# Altium PCB m6_base_v2.PcbDoc
Units mm, origin at the board's own origin, x right, y up, seen from the top; angles counter-clockwise.
Board outline 85 x 85 mm, 2 copper layers (Top Layer, Bottom Layer); 62 components, 65 nets, 251 pads, 206 vias.
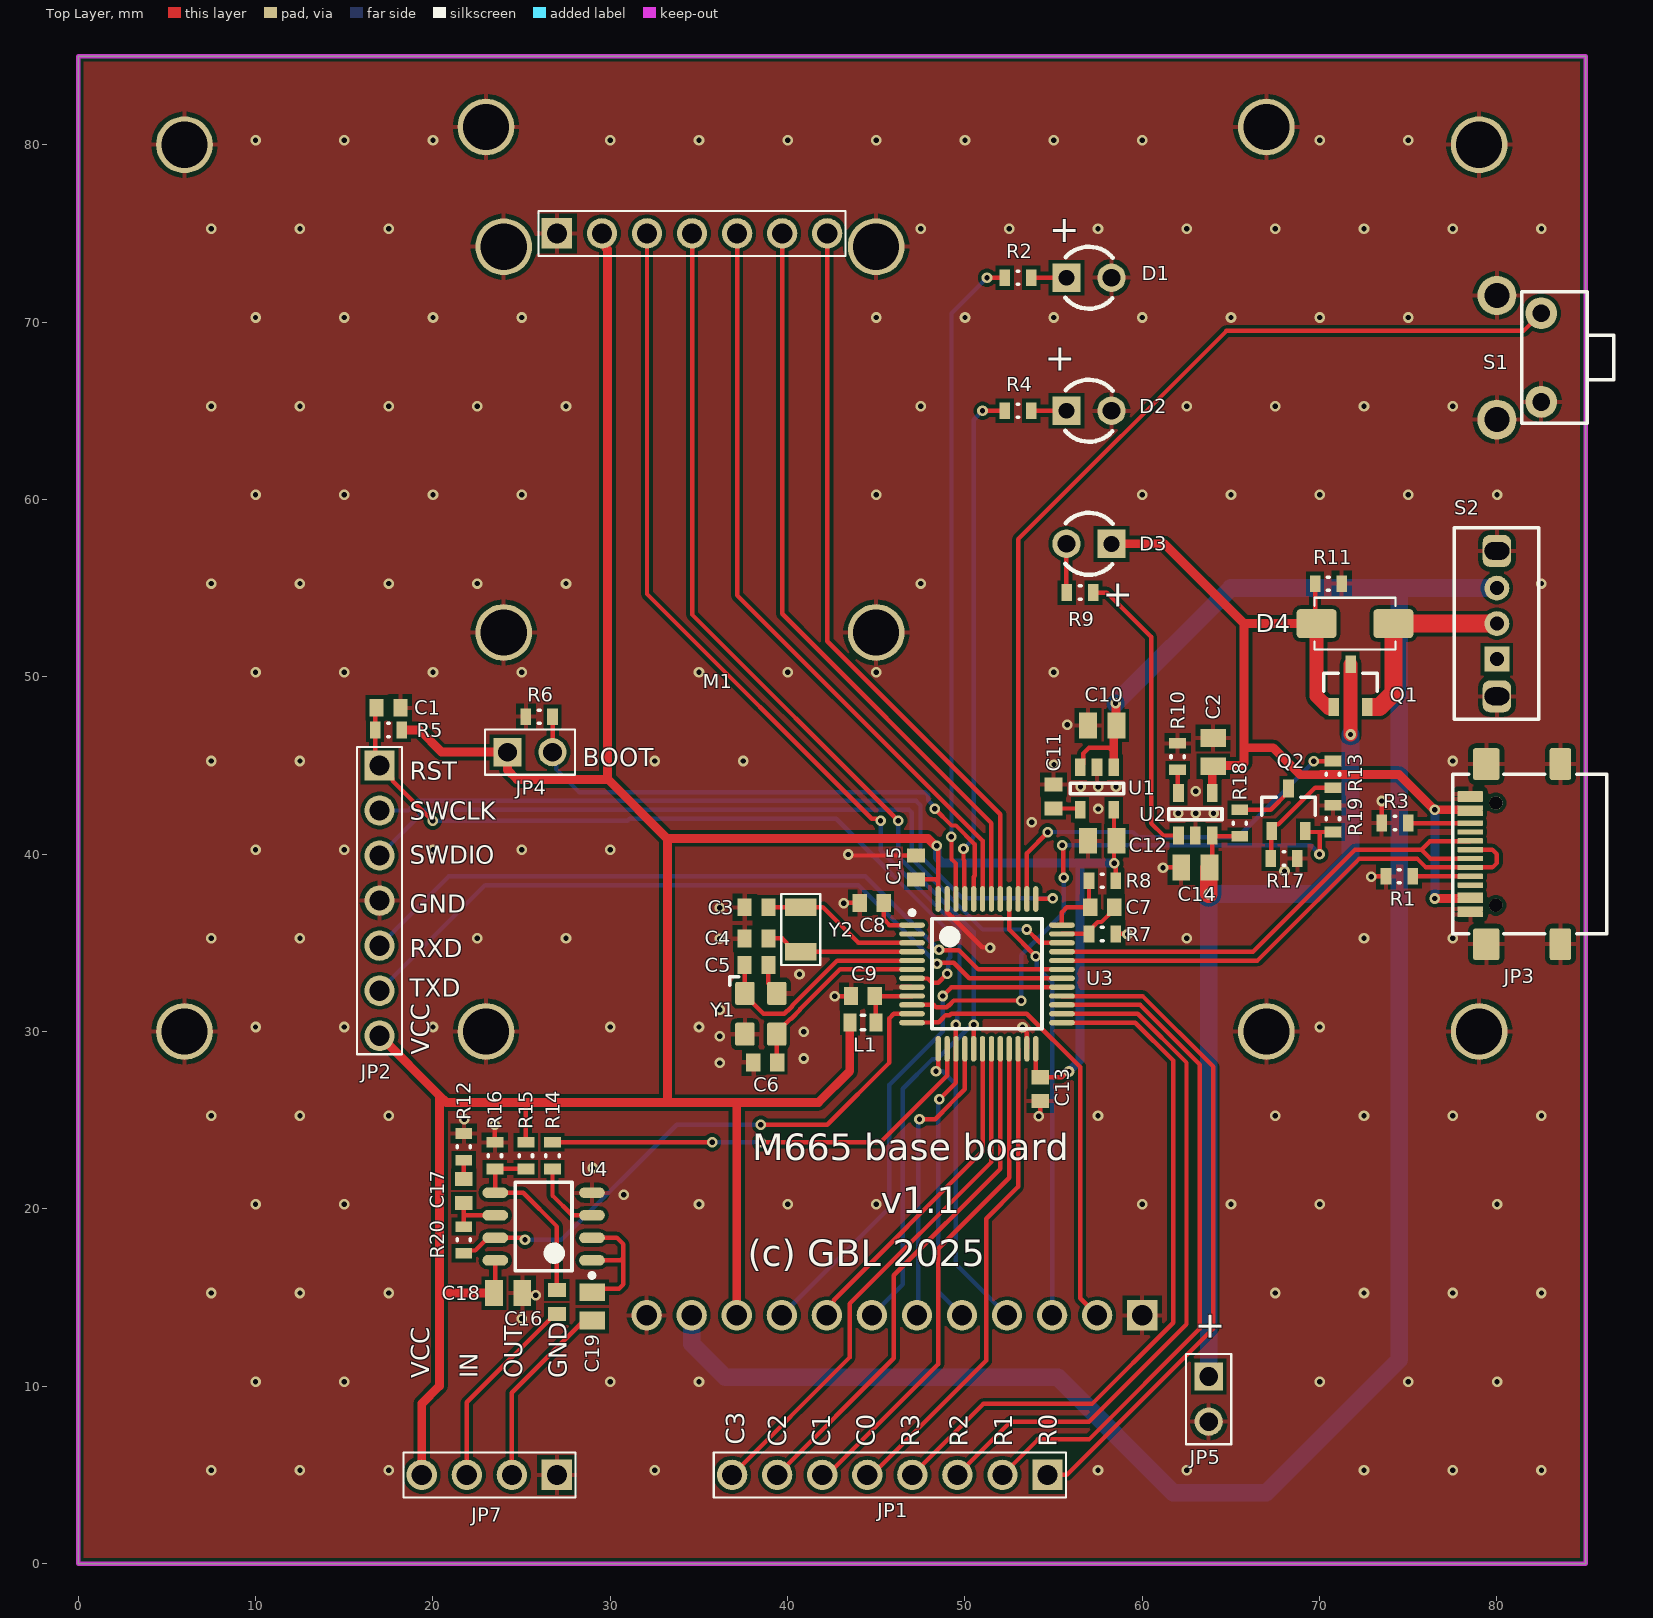
[diagram p0: Top Layer view]
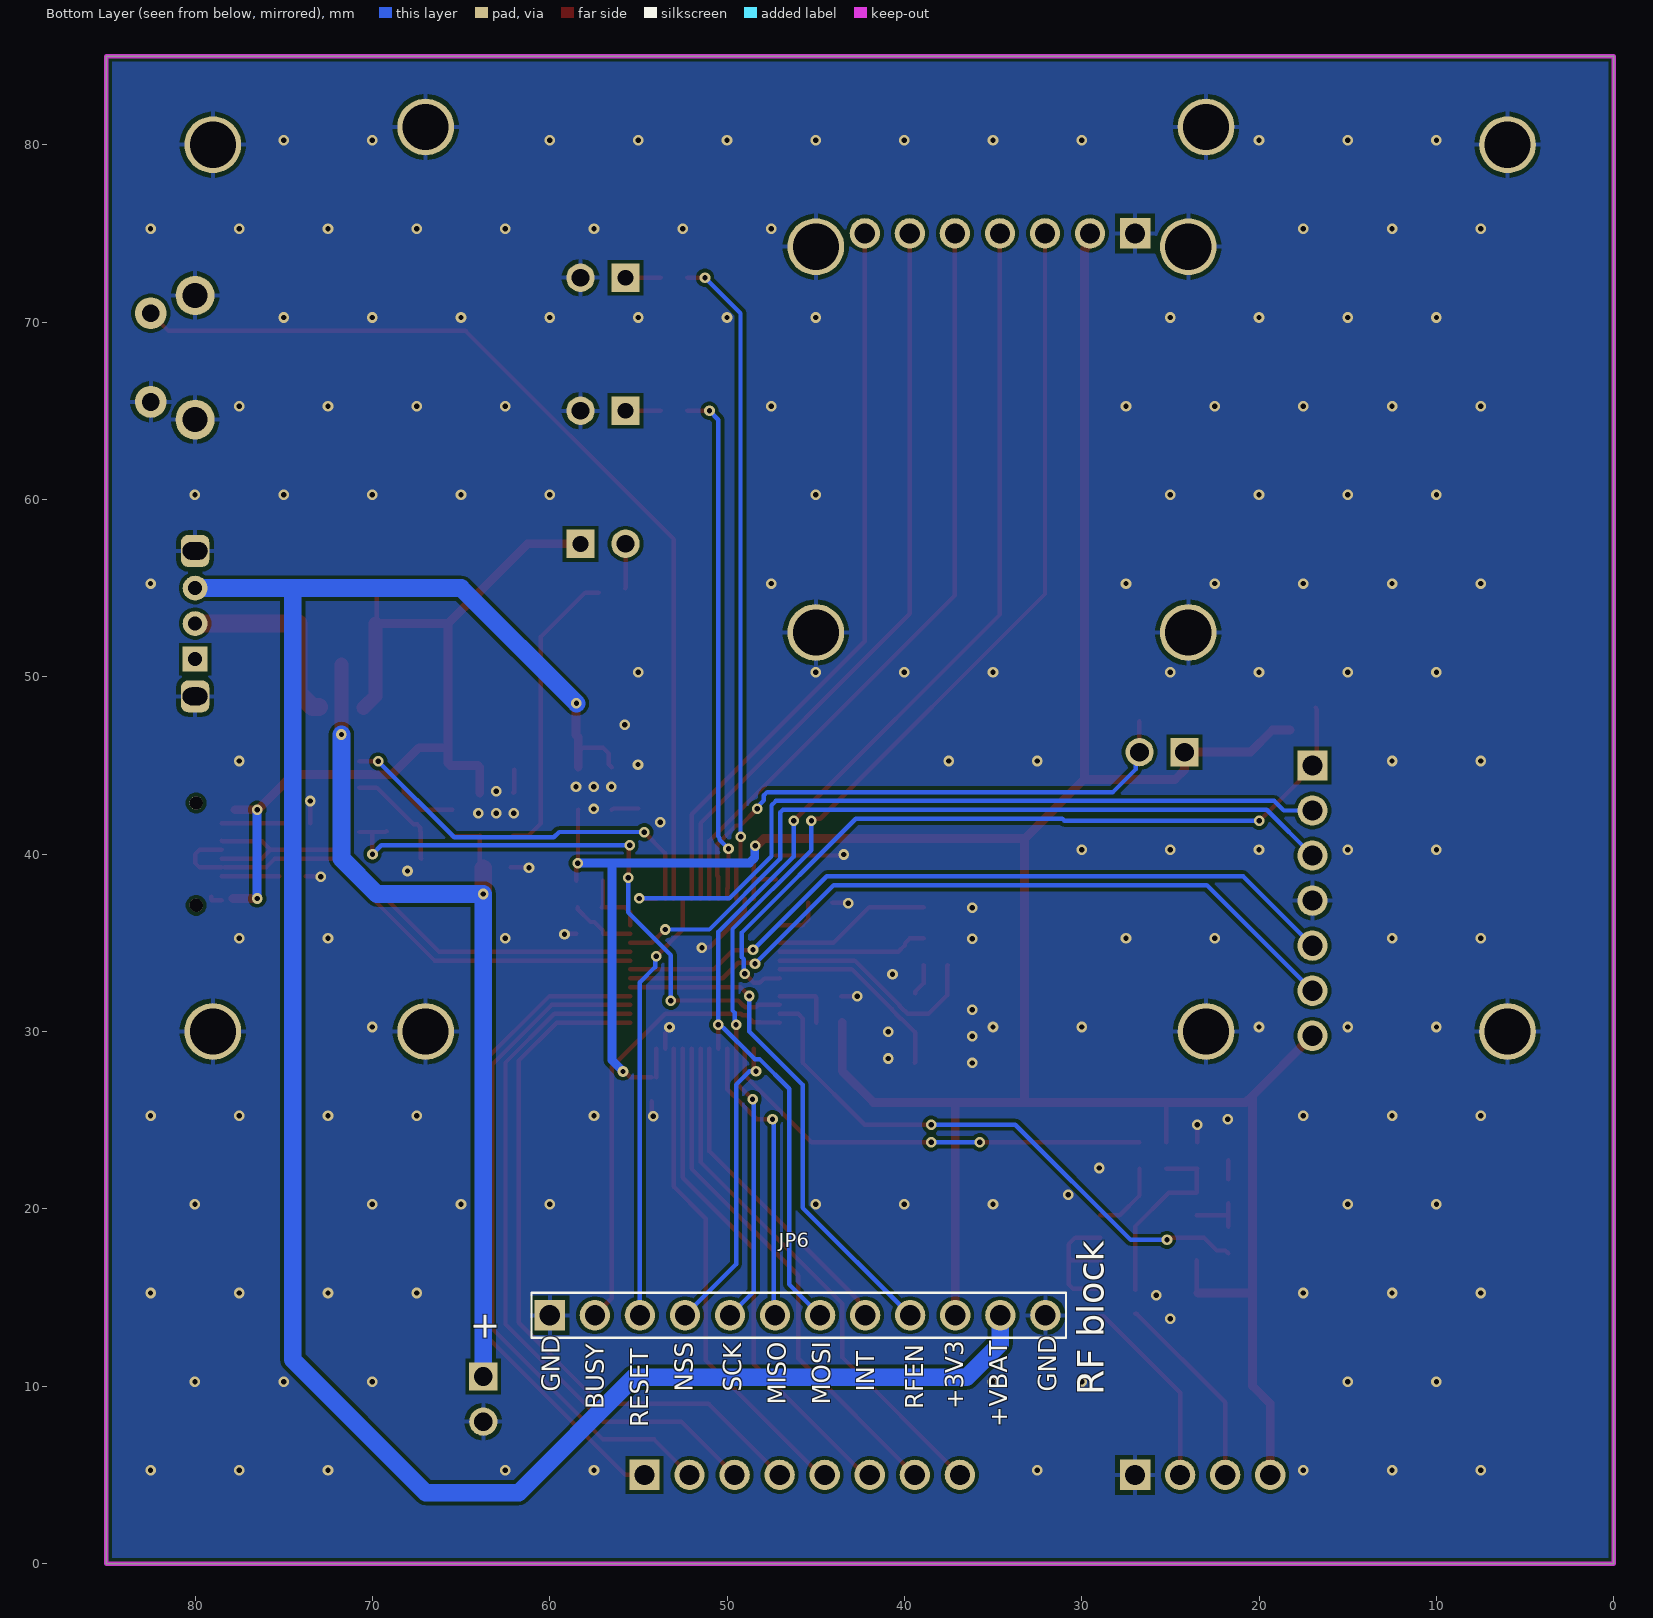
[diagram p1: Bottom Layer view, seen from below]
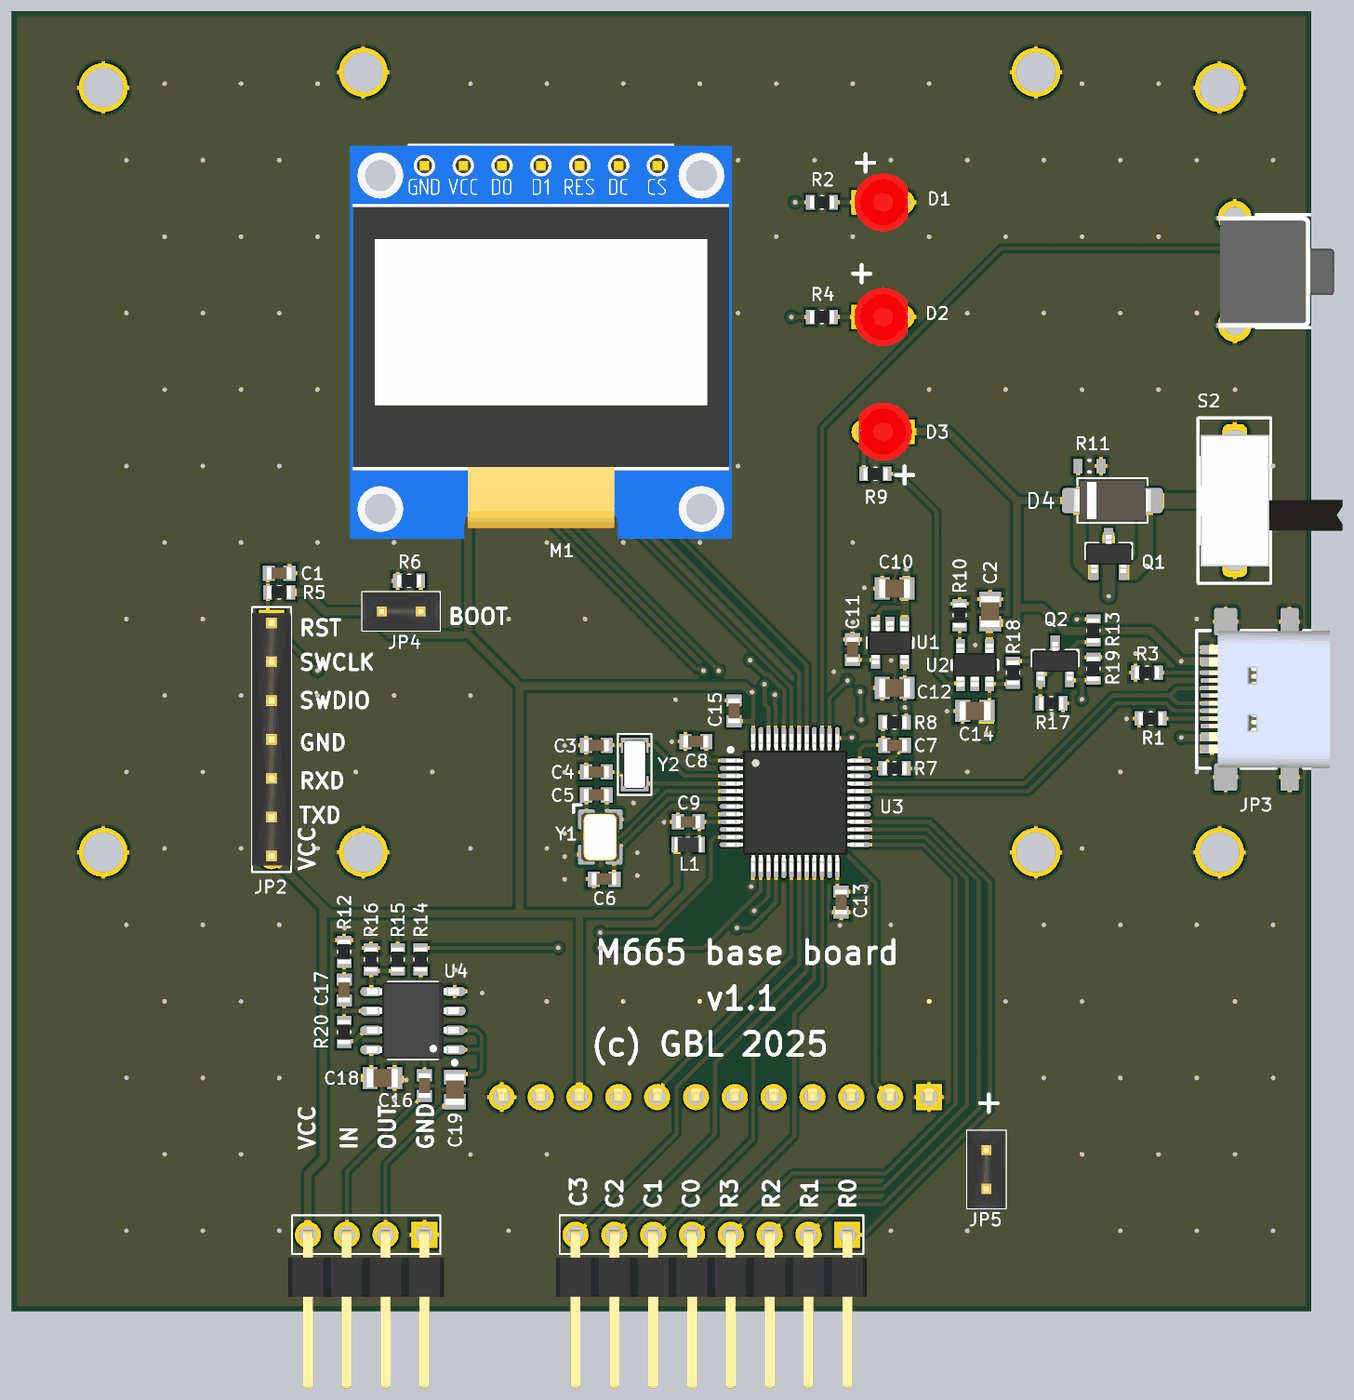
[diagram p2: 3D render of the assembled board from above, using the file's embedded part models]

## Layer stack, top to bottom
Top Solder: solder mask 0.0102, Solder Resist, Dk 3.5
Top Layer: signal copper 0.0356
Dielectric 1: dielectric 0.32, FR-4, Dk 4.8
Bottom Layer: signal copper 0.0356
Bottom Solder: solder mask 0.0102, Solder Resist, Dk 3.5

## Board outline
0,0 0,85 85,85 85,0

## Design rules (kind name [scope] priority, off if disabled: settings)
Clearance [All] p1: gap=0.2 ignorepadtopadclearanceinfootprint=FALSE
ComponentClearance [All] p1: gap=0.2 collisioncheckmode=3 verticalgap=0.2 showdistances=FALSE
HoleSize [All] p1: absolutevalues=TRUE maxlimit=5 minlimit=0.025 maxpercent=80.000 minpercent=20.000
MinimumSolderMaskSliver [All] p1: minsoldermaskwidth=0.05
PolygonConnect PolygonConnect_2 [All vs IsNamedPolygon('GND_L01_P001') Or IsNamedPolygon('GND_L01_P002') Or IsNamedPolygon('GND_L02_P000')] p1: thpad.connectstyle=Relief thpad.reliefconductorwidth=0.254 thpad.reliefentries=4 thpad.polygonreliefangle="90 Angle" thpad.airgapwidth=0.254 smdpad.connectstyle=Relief smdpad.reliefconductorwidth=0.254 smdpad.reliefentries=4 smdpad.polygonreliefangle="90 Angle" smdpad.airgapwidth=0.254 via.connectstyle=Direct via.reliefconductorwidth=0.254 via.reliefentries=4 via.polygonreliefangle="90 Angle" via.airgapwidth=0.254
PolygonConnect PolygonConnect_1 [All vs IsNamedPolygon('GND_L01_P001') Or IsNamedPolygon('GND_L02_P000')] p2: thpad.connectstyle=Relief thpad.reliefconductorwidth=0.254 thpad.reliefentries=4 thpad.polygonreliefangle="90 Angle" thpad.airgapwidth=0.25 smdpad.connectstyle=Relief smdpad.reliefconductorwidth=0.254 smdpad.reliefentries=4 smdpad.polygonreliefangle="90 Angle" smdpad.airgapwidth=0.25 via.connectstyle=Direct via.reliefconductorwidth=0.254 via.reliefentries=4 via.polygonreliefangle="90 Angle" via.airgapwidth=0.254
PolygonConnect [All] p3: connectstyle=Relief reliefconductorwidth=0.254 reliefentries=4 polygonreliefangle="90 Angle" airgapwidth=0.254
RoutingVias [All] p1: holewidth=0.711 width=1.27 viastyle="Through Hole" minholewidth=0.711 minwidth=1.27 maxholewidth=0.711 maxwidth=1.27
SilkToSilkClearance [All] p1: silktosilkclearance=0.1
SilkToSolderMaskClearance [IsPad] p1: minsilkscreentomaskgap=0.05 clearancetoexposedcopper=TRUE
SolderMaskExpansion [All] p1: expansion=0.102 istentingtop=FALSE
SupplyNets "Schematic Supply Nets_4" [InNet('V_BATT')] p1: voltage=0.000
SupplyNets "Schematic Supply Nets_3" [InNet('V_IN')] p2: voltage=0.000
SupplyNets "Schematic Supply Nets_2" [InNet('GND')] p3: voltage=0.000
SupplyNets "Schematic Supply Nets_1" [InNet('V_BUS')] p4: voltage=0.000
SupplyNets "Schematic Supply Nets" [InNet('VCC')] p5: voltage=0.000
Width [All] p1: maxlimit=2 minlimit=0.2 preferedwidth=0.25
25 further rules are at their usual default settings.

## Components (designator, comment, footprint, x,y, rotation, side; value= is the part's Value field where it differs from the comment)
C1 "100nF" C-0603 17.5,48.25 r180 top
C2 "10uF" C-0805 64,45.75 r270 top
C3 "22pF" C-0603 38.25,37 r0 top
C4 "22pF" C-0603 38.25,35.25 r0 top
C5 "22pF" C-0603 38.25,33.75 r180 top
C6 "22pF" C-0603 38.75,28.25 r180 top
C7 "nc" C-0603 57.75,37 r180 top
C8 "100nF" C-0603 44.75,37.25 r180 top
C9 "1uF" C-0603 44.25,32 r0 top
C10 "10uF" C-0805 57.75,47.25 r180 top
C11 "nc" C-0603 55,43.25 r90 top
C12 "10uF" C-0805 57.75,40.75 r180 top
C13 "100nF" C-0603 54.25,26.75 r90 top
C14 "10uF" C-0805 63,39.25 r0 top
C15 "100nF" C-0603 47.25,39.25 r270 top
C16 "1uF" C-0603 27,14.75 r90 top
C17 "1uF" C-0603 21.75,21 r270 top
C18 "10uF" C-0805 24.25,15.25 r180 top
C19 "CAPN" C-0805 29,14.5 r270 top
D1 "DLED" LED_3mm_RED 57,72.5 r0 top
D2 "DLED" LED_3mm_RED 57,65 r0 top
D3 "DLED" LED_3mm_RED 57,57.5 r180 top
D4 "DIODSH" D-SMA 72,53 r0 top
JP1 "HEADER8" PLS1-8R_1 54.66,5 r180 top
JP2 "HEADER 7" PLS1-7 17,45 r270 top
JP3 "L-KLS1-5473" L-KLS1-5473 78.5,40 r90 top
JP4 "JMP 2" PLS1-2 24.21,45.75 r0 top
JP5 "HEADER 2" PLS1-2 63.75,10.54 r270 top
JP6 "HEADER 12" PLS1-12R_1 60,14 r180 bottom locked
JP7 "HEADER4" PLS1-4R 27,5 r180 top
L1 "BEAD" L-0603 44.25,30.5 r180 top
M1 "OLED0_96" OLED096 27,75 r0 top locked
Q1 "IRLML6401" SOT-23 71.75,49.5 r90 top
Q2 "2N7002" SOT-23 68.25,42.5 r90 top
R1 "5k1" R-0603 74.5,38.75 r0 top
R2 "470" R-0603 53,72.5 r180 top
R3 "5k1" R-0603 74.25,41.75 r0 top
R4 "470" R-0603 53,65 r180 top
R5 "22k" R-0603 17.5,47 r180 top
R6 "22k" R-0603 26,47.75 r0 top
R7 "nc" R-0603 57.75,35.5 r180 top
R8 "nc" R-0603 57.75,38.5 r180 top
R9 "1k" R-0603 56.5,54.75 r180 top
R10 "4k7" R-0603 62,45.5 r270 top
R11 "10k" R-0603 70.5,55.25 r180 top
R12 "10k" R-0603 21.75,23.5 r270 top
R13 "1k" R-0603 70.75,44.5 r90 top
R14 "10k" R-0603 26.75,23 r270 top
R15 "100k" R-0603 25.25,23 r90 top
R16 "100k" R-0603 23.5,23 r90 top
R17 "1M" R-0603 68,39.75 r180 top
R18 "100k" R-0603 65.5,41.75 r270 top
R19 "10k" R-0603 70.75,42 r270 top
R20 "100k" R-0603 21.75,18.25 r90 top
S1 "KLS7-TS3602 -3 15-180" KLS7-TS3602 82.5,68 r90 top
S2 "SW SPDT" SK-12D07VG5 80,53 r90 top
U1 "LP5907MFX-3.0" SOT-23-5 57.45,43.7 r270 top
U2 "MCP73831-2ATI/OT" SOT-23-5 63,42.25 r90 top value={Value}
U3 "AT32F413CBU7" LQFP-48 51.25,33.25 r0 top
U4 "LM2904DR" SO-8 26.25,19 r180 top
Y1 "8.0M" ZQ_SJK-7U 38.5,31 r270 top
Y2 "32.768k" KX-327 40.75,35.75 r90 top

## Footprints (in the part's own frame and the unit in brackets; to place one, negate y for a bottom-side part, rotate by r counter-clockwise, add the part's x,y. Pads: shape width x height; smd on the part's side, far side on the other; paste and mask are expansions set on the pad)
C-0603 [mm] "Chip Capacitor, 2-Leads, Body 1,60x0,80mm, IPC Medium Density"
  rect 0.8x1 smd: 1(-0.675,0) 2(0.675,0)
  body extent -0.8,-0.4 0.8,0.4, height 0.8
C-0805 [mm] "Chip Capacitor, 2-Leads, Body 2,00x1,25mm, IPC Medium Density"
  rect 1x1.45 smd: 1(-0.8,0) 2(0.8,0)
  body extent -1,-0.62 1,0.63, height 1.25
D-SMA [mm] "Diode, Molded Body; 4.315 mm L X 2.605 mm W X 2.41 mm H body"
  rrect30% 2.27x1.65 smd: 1(-2.165,0) 2(2.165,0)
  silkscreen extent -2.29,-1.46 2.29,1.46, body extent -2.61,-1.3 2.61,1.3, height 2.41
KLS7-TS3602 [mm] "miniature switch"
  round 1.8 hole 1: 1(-2.5,0) 2(2.5,0)
  oval 2.25x2.2 hole 1.4: 3(-3.5,2.5)
  round 2.2 hole 1.4: 3(3.5,2.5)
  silkscreen extent -3.7,-4.1 3.7,1.1, body extent -3.7,-3.97 3.6,3.75, height 4.4
KX-327 [mm]
  rect 1x1.8 smd: 1(-1.25,0) 2(1.25,0)
  silkscreen extent -2,-1.1 2,1.1, body extent -1.6,-0.75 1.6,0.75, height 0.71
L-0603 [mm] "Chip Inductor, 2-Leads, Body 1,60x0,80mm, IPC Medium Density"
  rect 0.74x1.02 smd: 1(-0.735,0) 2(0.735,0)
  silkscreen extent -0.1,-0.41 0.1,0.41, body extent -0.9,-0.5 0.9,0.5, height 1
L-KLS1-5473 [mm] "USB 3.1 Type C"
  rrect20% 1.8x1.2 smd mask+0.07: 1(-5.08,-5.08) 1(5.08,-5.08)
  rrect20% 1.8x1.5 smd mask+0.07: 1(-5.08,-0.9) 1(5.08,-0.9)
  rrect30% 0.3x1.45 smd paste-2 mask+0.07: A1(-3.1,0) A4(-2.6,0) A9(2.6,0) A12(3.4,0) B1(3.1,0) B4(2.3,0) B9(-2.3,0) B12(-3.4,0)
  rrect30% 0.3x1.45 smd mask+0.07: A5(-1.25,0) A6(-0.25,0) A7(0.25,0) A8(1.25,0) B5(1.75,0) B6(0.75,0) B7(-0.75,0) B8(-1.75,0)
  round 0.75 hole 0.75 unplated paste-2539.97 mask+0.07: MH(-2.885,-1.44) MH(2.885,-1.44)
  silkscreen extent -4.5,-7.69 4.5,1, body extent -4.47,-7.7 4.47,0.2, height 3.2
LED_3mm_RED [mm]
  rect 1.6x1.6 hole 0.9: 1(-1.27,0)
  round 1.6 hole 1: 2(1.27,0)
  silkscreen extent -1.34,-1.75 1.34,1.75, body extent -1.9,-1.9 1.6,1.9, height 5.75
LQFP-48 [mm] "TSQFP, 48-Leads, Body 7,00x7,00mm, Pitch 0,50mm, IPC Medium Density"
  oval 1.45x0.3 smd: 1(-4.225,2.75) 2(-4.225,2.25) 3(-4.225,1.75) 4(-4.225,1.25) 5(-4.225,0.75) 6(-4.225,0.25) 7(-4.225,-0.25) 8(-4.225,-0.75) 9(-4.225,-1.25) 10(-4.225,-1.75) 11(-4.225,-2.25) 12(-4.225,-2.75) 25(4.225,-2.75) 26(4.225,-2.25) 27(4.225,-1.75) 28(4.225,-1.25) 29(4.225,-0.75) 30(4.225,-0.25) 31(4.225,0.25) 32(4.225,0.75) 33(4.225,1.25) 34(4.225,1.75) 35(4.225,2.25) 36(4.225,2.75)
  oval 0.3x1.45 smd: 13(-2.75,-4.225) 14(-2.25,-4.225) 15(-1.75,-4.225) 16(-1.25,-4.225) 17(-0.75,-4.225) 18(-0.25,-4.225) 19(0.25,-4.225) 20(0.75,-4.225) 21(1.25,-4.225) 22(1.75,-4.225) 23(2.25,-4.225) 24(2.75,-4.225) 37(2.75,4.225) 38(2.25,4.225) 39(1.75,4.225) 40(1.25,4.225) 41(0.75,4.225) 42(0.25,4.225) 43(-0.25,4.225) 44(-0.75,4.225) 45(-1.25,4.225) 46(-1.75,4.225) 47(-2.25,4.225) 48(-2.75,4.225)
  silkscreen extent -4.35,-3.1 3.1,3.57, body extent -4.5,-4.5 4.5,4.5, height 1.5
OLED096 [mm] "Header, Vertical, 2.54 mm pitch; 0.70 mm lead width, 7 pins, 1 row, 7 pins per row, 16.51 mm L X 2.54 mm W X 7.54 mm H body"
  rect 1.71x1.71 hole 1.14 paste-2539.97: 1(0,0)
  round 1.71 hole 1.14 paste-2539.97: 2(2.54,0) 3(5.08,0) 4(7.62,0) 5(10.16,0) 6(12.7,0) 7(15.24,0)
  silkscreen extent -1.04,-1.27 16.28,1.27, body extent -4.88,-24.5 20.12,1.2, height 9.08
PLS1-2 [mm] "Header, Vertical, 2.54 mm pitch; 0.64 mm lead width, 2 pins, 1 row, 2 pins per row, 5.08 mm L X 2.54 mm W X 8.54 mm H body"
  rect 1.59x1.59 hole 1.06 paste-2539.97: 1(0,0)
  round 1.59 hole 1.06 paste-2539.97: 2(2.54,0)
  silkscreen extent -1.27,-1.27 3.81,1.27, body extent -1.27,-1.27 3.81,1.27, height 8.54
PLS1-4R [mm] "Header, Vertical, 2.54 mm pitch; 0.70 mm lead width, 4 pins, 1 row, 4 pins per row, 8.89 mm L X 2.54 mm W X 7.54 mm H body"
  rect 1.71x1.71 hole 1.14 paste-2539.97: 1(0,0)
  round 1.71 hole 1.14 paste-2539.97: 2(2.54,0) 3(5.08,0) 4(7.62,0)
  silkscreen extent -1.04,-1.27 8.66,1.27, body extent -1.27,-0.32 8.89,10.04, height 2.54
PLS1-7 [mm] "Header, Vertical, 2.54 mm pitch; 0.70 mm lead width, 7 pins, 1 row, 7 pins per row, 16.51 mm L X 2.54 mm W X 7.54 mm H body"
  rect 1.71x1.71 hole 1.14 paste-2539.97: 1(0,0)
  round 1.71 hole 1.14 paste-2539.97: 2(2.54,0) 3(5.08,0) 4(7.62,0) 5(10.16,0) 6(12.7,0) 7(15.24,0)
  silkscreen extent -1.04,-1.27 16.28,1.27, body extent -0.64,-1.27 15.88,1.27, height 7.54
PLS1-8R_1 [mm] "Header, Vertical, 2.54 mm pitch; 0.70 mm lead width, 8 pins, 1 row, 8 pins per row, 19.05 mm L X 2.54 mm W X 7.54 mm H body"
  rect 1.71x1.71 hole 1.14 paste-2539.97: 1(0,0)
  round 1.71 hole 1.14 paste-2539.97: 2(2.54,0) 3(5.08,0) 4(7.62,0) 5(10.16,0) 6(12.7,0) 7(15.24,0) 8(17.78,0)
  silkscreen extent -1.04,-1.27 18.82,1.27, body extent -1.27,-0.32 19.05,10.04, height 2.54
PLS1-12R_1 [mm] "Header, Vertical, 2.54 mm pitch; 0.70 mm lead width, 10 pins, 1 row, 10 pins per row, 24.13 mm L X 2.54 mm W X 7.54 mm H body"
  rect 1.71x1.71 hole 1.14 paste-2539.97: 1(0,0)
  round 1.71 hole 1.14 paste-2539.97: 2(2.54,0) 3(5.08,0) 4(7.62,0) 5(10.16,0) 6(12.7,0) 7(15.24,0) 8(17.78,0) 9(20.32,0) 10(22.86,0) 11(25.4,0) 12(27.94,0)
  silkscreen extent -1.04,-1.27 29.1,1.27, body extent -1.27,-0.32 29.21,10.04, height 5.04
R-0603 [mm] "Chip Resistor, 2-Leads, Body 1,60x0,82mm, IPC Medium Density"
  rect 0.6x0.95 smd: 1(-0.75,0) 2(0.75,0)
  silkscreen extent -0.05,-0.38 0.05,0.38, body extent -0.8,-0.4 0.8,0.4, height 0.45
SK-12D07VG5 [mm]
  rect 1.4x1.4 hole 0.8: 1(-2,0)
  round 1.4 hole 0.8: 2(0,0) 3(2,0)
  rrect50% 1.8x1.6 hole 1 slot 1.4 at 90 deg: S1(-4.1,0) S1(4.1,0)
  silkscreen extent -5.4,-2.35 5.4,2.4, body extent -4.3,-7.05 4.3,2.3, height 4.75
SO-8 [mm] "SOIC, 8-Leads, Body 4,90x3,90mm, Pitch 1,27mm, IPC Medium Density"
  oval 1.45x0.6 smd: 1(-2.725,1.905) 2(-2.725,0.635) 3(-2.725,-0.635) 4(-2.725,-1.905) 5(2.725,-1.905) 6(2.725,-0.635) 7(2.725,0.635) 8(2.725,1.905)
  silkscreen extent -2.85,-2.5 1.6,2.88, body extent -3,-2.5 3,2.5, height 1.75
SOT-23 [mm]
  rect 1x0.6 smd: 1(-1.2,0.95) 2(-1.2,-0.95) 3(1.2,0)
  silkscreen extent -0.3,-1.5 0.7,1.5, body extent -1.25,-1.5 1.25,1.5, height 1.2
SOT-23-5 [mm] "SOT23, 5-Leads, Body 2,90x2,45mm, Pitch 0,95mm, IPC Medium Density"
  rect 1x0.6 smd: 1(-1.2,0.95) 2(-1.2,0) 3(-1.2,-0.95) 4(1.2,-0.95) 5(1.2,0.95)
  silkscreen extent -0.3,-1.5 0.3,1.5, body extent -1.4,-1.45 1.4,1.45, height 1.55
ZQ_SJK-7U [mm]
  rrect20% 1.3x1.1 smd mask+0.06: 1(-1.15,-0.9) 2(1.15,-0.9) 3(1.15,0.9) 4(-1.15,0.9)
  silkscreen extent -2.1,-1.75 -1.6,-1.25, body extent -1.6,-1.25 1.6,1.25, height 0.6

## Part data
C1 C2 C3 C4 C5 C6 C7 C8 C9 C10 C11 C12 C13 C14 C15 C16 C17 C18: library part CAPN, Voltage=50V, Вид=Конденсатор, Точність/група=NP0
C19: Voltage=50V, Вид=Конденсатор, Точність/група=NP0
Q1: library part MOSF-P, Вид=Транзистор
Q2: library part MOSF-N, Вид=Транзистор
R1 R2 R3 R4 R5 R6 R7 R8 R9 R10 R11 R12 R13 R14 R15 R16 R17 R18 R19 R20: library part RES, Вид=Резистор, Точність/група=5%
S1: library part SW-1, Вид=Кнопка
U1: library part LP5907, "250mA Low-Dropout Regulator", Вид=Мікросхема
U2: Man#Part Num#=TPS61023DRLT, Manufacturer="Texas Instruments", Package=SOT-563, Temperature Range="-40°C ~ 125°C (TJ)", Component Type=SMD, Footprint Part=IC-package.PcbLib, IC Type=PMIC, Library Part=IC`s.SchLib, Mounting  Method=SMD, Part Number=MCP73831-2ATI/OT, Part Type=IC, Suplier 1=https://www.digikey.com.au/en/products/detail/texas-instruments/TPS61023DRLT/11310622?s=N4IgTCBcDaICoAUDKA2AjABjAZgCICUAZOEAXQF8g, URL=https://www.ti.com/general/docs/suppproductinfo.tsp?distId=10&gotoUrl=https%3A%2F%2Fwww.ti.com%2Flit%2Fgpn%2Ftps61023
U4: library part LM2904, "Dual Operational Amplifiers, SOIC-8", Вид=Мікросхема
Y1: library part TSX-3225, "Crystal, 24 MHz, 9 pF, SMD", Вид=Трансформатор
Y2: library part Y, Вид=Кварц, Точність/група=20ppm
D1 D2 D3: Вид=Світлодіод
D4: Вид=Діод
JP1 JP2 JP4 JP5 JP6 JP7: Вид=Роз'єм
JP3: Mounting  Method=SMD
L1: Вид="Ferrite bead"
S2: Вид=Перемикач
U3: Вид=Мікросхема

## Free pads (board coordinates)
  round 3.2 hole 2.6: 1(6,30) 1(6,80) 1(23,30) 1(23,81) 1(24,52.5) 1(24,74.25) 1(45,52.5) 1(45,74.25) 1(67,30) 1(67,81) 1(79,30) 1(79,80)

## Via types
v1: diameter 0.6, hole 0.3, Top Layer to Bottom Layer, tented both sides, 206 vias

## Nets (pads, with @x,y where several pads share a name; then routed paths per layer and width w, separated by ;. In a path a pad name is that pad's centre, name@x,y a point inside that pad or via, vN(x,y) a via of type N, cw(c..) or ccw(c..) an arc to the next point about the centre after c; other vN are vias at no path point)
ADC_IN: R20.1 U3.11 U4.7 | length 32.4
  Top Layer w0.25: R20.1 21.903,17.653 22.403,17.653 23.115,18.365 24.993,18.365 25.108,18.25 v1(25.203,18.25) ; v1(38.5,24.75) 42.25,24.75 45.75,28.25 45.75,30.75 46,31 U3.11
  Bottom Layer w0.25: v1(25.203,18.25) 27.25,18.25 33.75,24.75 v1(38.5,24.75)
AUDIO_IN: C16.1 JP7.3 | length 11.2
  Top Layer w0.25: JP7.3 21.92,9.095 26.9,14.075 C16.1
AUDIO_OUT: C19.2 JP7.2 | length 11
  Top Layer w0.25: JP7.2 24.46,9.635 28.775,13.95 C19.2@29,13.95
BAT_LEVEL: Q2.2 R19.2 U3.10 | length 33.8
  Top Layer w0.25: U3.10 48.253,31.5 48.378,31.375 48.971,31.375 49.052,31.457 49.086,31.457 49.38,31.75 v1@53.25,31.75 ; v1(55.5,40.5) 55.539,40.461 55.539,38.711 v1(55.579,38.671) ; Q2.2 69.25,41.25 70,41.25 ; v1(70,40) 70,41.25 ; R19.2 70,41.25
  Bottom Layer w0.25: v1(53.174,31.729) 53.174,34.308 55.579,36.713 v1(55.579,38.671) ; v1(55.5,40.5) 69.5,40.5 v1(70,40)
BAT_MEAS: R13.2 U3.38 | length 22.3
  Top Layer w0.25: U3.38 53.5,40.055 v1(54.674,41.229) ; v1@69.5,45.25 R13.2
  Bottom Layer w0.25: v1@54.75,41.25 59.475,41.25 59.775,40.95 65.395,40.95 v1(69.674,45.229)
BOOT: JP4.2 R6.2 U3.44 | length 32
  Top Layer w0.25: R6.2@26.75,47.5 26.77,47.48 26.77,45.27 JP4.2@26.79,45.25 ; v1(48.308,42.558) 49.251,41.615 49.499,41.615 50.55,40.564 50.55,38.78 50.5,38.73 U3.44
  Bottom Layer w0.25: JP4.2 26.952,45.548 26.952,44.798 28.25,43.5 47.75,43.5 47.927,43.323 47.927,43.034 48.308,42.653 v1(48.308,42.558)
C0: JP1.5 U3.22 | length 27.7
  Top Layer w0.25: JP1.5 44.75,5 51.2,11.45 51.2,19.45 53,21.25 U3.22
C1: JP1.6 U3.21 | length 28.6
  Top Layer w0.25: JP1.6 42.25,5 48.5,11.25 48.5,17.75 52.5,21.75 U3.21
C2: JP1.7 U3.20 | length 29.2
  Top Layer w0.25: JP1.7 46,11.58 46,16.25 52,22.25 U3.20
C3: JP1.8 U3.19 | length 30.1
  Top Layer w0.25: JP1.8 43.5,11.62 43.5,14.644 51.5,22.644 U3.19
DAC_OUT: R14.1 U3.14 | length 25.3
  Top Layer w0.25: R14.1 v1(35.75,23.75) ; v1(38.5,23.75) 45.25,23.75 49,27.5 U3.14
  Bottom Layer w0.25: v1(35.75,23.75) v1(38.5,23.75)
DM: JP3.A7 JP3.B7 U3.32 | length 29.2
  Top Layer w0.25: U3.32 66.5,34 72.25,39.75 75.5,39.75 76,39.25 JP3.B7@78.354,39.25 ; JP3.B7 79.75,39.25 80,39.5 80,40 79.75,40.25 JP3.A7
DP: JP3.A6 JP3.B6 U3.33 | length 28.6
  Top Layer w0.25: U3.33 66.25,34.5 72,40.25 75.75,40.25 ; JP3.A6 76.25,39.75 75.75,40.25 ; JP3.B6 78.475,40.725 76.225,40.725 75.75,40.25
GND: C1.1 C2.1 C3.1 C4.1 C5.1 C6.2 C8.2 C9.1 C10.2 C11.2 C12.2 C13.1 C14.1 C15.1 C18.1 D1.2 D2.2 JP2.4 JP3.1 JP3.A1 JP3.A12 JP3.B1 JP3.B12 JP5.2 JP6.1 JP6.12 JP7.1 M1.1 pad.1 R1.1 R3.1 R6.1 R7.1 R10.1 R11.1 R12.1 R16.2 R17.1 R19.1 S1.1 S1.3 S2.S1 U1.2 U2.2 U3.8 U3.23 U3.47 U4.4 Y1.2 Y1.4 | length 18.1
  Top Layer w0.25: R16.2 v1(23.5,24.75) ; C5.1 38.925,32.725 39.4,32.25 Y1.4 ; v1@42.75,32 C9.1 ; v1@43.25,37.25 C8.2 ; v1@43.5,40 43.575,39.925 C15.1 ; U3.47 49.01,37.465 49.01,36.719 50.978,34.75 v1@51.5,34.75 ; v1(53.25,30.25) 53.25,30.155 53.49,29.915 53.49,29.035 U3.23 ; v1@54.25,25.25 C13.1 ; R7.1 v1@59.25,35.5 ; v1@61.25,39.25 C14.1 ; v1@73,38.75 R1.1 ; R3.1 v1(73.5,43)
  other v1: 7.51,5.256 12.51,5.256 17.51,5.256 32.51,5.256 57.51,5.256 62.51,5.256 72.51,5.256 77.51,5.256 82.51,5.256 10.01,10.256 15.01,10.256 30.01,10.256 35.01,10.256 70.01,10.256 75.01,10.256 80.01,10.256 25.026,13.8 25.804,15.123 7.51,15.256 12.51,15.256 17.51,15.256 67.51,15.256 72.51,15.256 77.51,15.256 82.51,15.256 10.01,20.256 15.01,20.256 35.01,20.256 40.01,20.256 45.01,20.256 60.01,20.256 65.01,20.256 70.01,20.256 80.01,20.256 30.776,20.8 29.026,22.3 21.776,25.05 54.174,25.229 7.51,25.256 12.51,25.256 17.51,25.256 57.51,25.256 67.51,25.256 72.51,25.256 77.51,25.256 82.51,25.256 36.174,28.229 40.924,28.479 36.174,29.729 40.924,29.979 10.01,30.256 15.01,30.256 20.01,30.256 30.01,30.256 35.01,30.256 70.01,30.256 36.174,31.229 42.674,31.979 40.674,33.229 51.424,34.729 36.174,35.229 7.51,35.256 12.51,35.256 22.51,35.256 27.51,35.256 62.51,35.256 72.51,35.256 77.51,35.256 59.174,35.479 36.174,36.979 43.174,37.229 72.924,38.729 68.026,39.05 61.174,39.229 43.424,39.979 10.01,40.256 15.01,40.256 20.01,40.256 25.01,40.256 30.01,40.256 53.776,41.8 62.026,42.3 63.026,42.3 64.026,42.3 57.526,42.55 63.026,43.55 56.526,43.8 57.526,43.8 58.526,43.8 55.026,45.05 7.51,45.256 12.51,45.256 32.51,45.256 37.51,45.256 77.51,45.256 55.776,47.3 10.01,50.256 15.01,50.256 20.01,50.256 25.01,50.256 35.01,50.256 40.01,50.256 45.01,50.256 55.01,50.256 7.51,55.256 12.51,55.256 17.51,55.256 22.51,55.256 27.51,55.256 47.51,55.256 82.51,55.256 10.01,60.256 15.01,60.256 20.01,60.256 25.01,60.256 45.01,60.256 60.01,60.256 65.01,60.256 70.01,60.256 75.01,60.256 80.01,60.256 7.51,65.256 12.51,65.256 17.51,65.256 22.51,65.256 27.51,65.256 47.51,65.256 62.51,65.256 67.51,65.256 72.51,65.256 77.51,65.256 10.01,70.256 15.01,70.256 20.01,70.256 25.01,70.256 45.01,70.256 50.01,70.256 55.01,70.256 60.01,70.256 65.01,70.256 70.01,70.256 75.01,70.256 7.51,75.256 12.51,75.256 17.51,75.256 47.51,75.256 52.51,75.256 57.51,75.256 62.51,75.256 67.51,75.256 72.51,75.256 77.51,75.256 82.51,75.256 10.01,80.256 15.01,80.256 20.01,80.256 30.01,80.256 35.01,80.256 40.01,80.256 45.01,80.256 50.01,80.256 55.01,80.256 60.01,80.256 70.01,80.256 75.01,80.256
GREEN: R2.2 U3.46 | length 37
  Top Layer w0.25: v1(49.24,40.99) 49.25,40.98 49.25,39.722 49.5,39.472 U3.46 ; v1(51.25,72.5) R2.2
  Bottom Layer w0.25: v1(49.24,40.99) 49.25,41 49.25,70.5 v1(51.25,72.5)
MISO: JP6.6 U3.16 | length 16.7
  Top Layer w0.25: v1(47.442,25.058) 48.326,25.058 49.192,25.924 49.192,25.942 50,26.75 U3.16
  Bottom Layer w0.25: JP6.6 47.375,14.075 47.375,24.991 v1(47.442,25.058)
MOSI: JP6.7 M1.4 U3.17 | length 71.5
  Top Layer w0.25: M1.4 34.62,53.514 46.25,41.884 v1(46.25,41.875) ; U3.17 v1(50.5,30.384)
  Bottom Layer w0.25: JP6.7 46.5,15.74 46.5,26.768 48.176,28.444 48.444,28.444 50.215,30.215 50.236,30.215 v1@50.442,30.421 ; v1(46.25,41.875) 46.25,39.864 50.5,35.614 v1(50.5,30.384)
NetC3_2: C3.2 U3.3 Y2.2 | length 8.9
  Top Layer w0.25: C3.2 Y2.2 42,37 44,35 U3.3
NetC4_2: C4.2 U3.4 Y2.1 | length 8.5
  Top Layer w0.25: C4.2 39.7,35.25 39.975,34.975 39.975,34.875 40.35,34.5 Y2.1 U3.4
NetC5_2: C5.2 U3.5 Y1.1 | length 12.8
  Top Layer w0.25: C5.2 37.6,33.725 Y1.1 37.6,32.05 38.65,31 39.814,31 39.989,31.175 40.02,31.175 40.275,31.43 40.275,31.461 42.814,34 U3.5
NetC6_1: C6.1 U3.6 Y1.3 | length 10.8
  Top Layer w0.25: C6.1 39.4,28.275 39.4,29.95 40.175,30.725 40.207,30.725 40.725,31.243 40.725,31.275 42.964,33.514 45.901,33.514 45.915,33.5 U3.6
NetC7_1: C7.1 R7.2 U3.35 | length 3.7
  Top Layer w0.25: U3.35 R7.2 57,35.675 57.5,36.175 57.7,36.175 58.425,36.9 C7.1
NetC7_2: C7.2 R8.2 U3.36 | length 4
  Top Layer w0.25: U3.36 55.475,36.725 55.75,37 C7.2 57,37.075 R8.2
NetC8_1: C8.1 U3.1 | length 2.7
  Top Layer w0.25: C8.1 45.425,36.325 45.75,36 U3.1
NetC9_2: C9.2 L1.1 U3.9 | length 3.5
  Top Layer w0.25: L1.1 44.985,31.94 45.045,32 U3.9
NetC11_1: C11.1 U1.4 | length 1.5
  Top Layer w0.25: C11.1 56.425,42.575 U1.4
NetC16_2: C16.2 R15.1 R16.1 U4.5 | length 10.9
  Top Layer w0.25: R15.1 R16.1 23.525,22.225 U4.5 25.095,20.905 27,19 C16.2
NetC17_1: C17.1 R12.2 | length 1.1
  Top Layer w0.25: C17.1 R12.2
NetC17_2: C17.2 R20.2 U4.6 | length 3.1
  Top Layer w0.25: R20.2 21.75,19.663 ; C17.2 21.75,19.663 ; U4.6 21.778,19.635 21.75,19.663
NetC19_1: C19.1 U4.1 U4.2 | length 7.9
  Top Layer w0.25: U4.1 30.595,17.095 30.75,17.25 ; U4.2 30.385,18.365 30.75,18 30.75,17.25 ; C19.1@29,15.55 29.05,15.5 30.5,15.5 30.75,15.75 30.75,17.25
NetD1_1: D1.1 R2.1 | length 2
  Top Layer w0.25: R2.1 D1.1
NetD2_1: D2.1 R4.1 | length 2
  Top Layer w0.25: R4.1 D2.1
NetD3_2: D3.2 R9.2 | length 2.5
  Top Layer w0.25: D3.2 55.73,55.02 R9.2@55.75,55
NetD4_2: D4.2 Q1.2 S2.2 | length 11
  Top Layer w1: 73,48.3 73.379,48.3 74.165,49.086 D4.2 ; D4.2@74.415,53 S2.2
NetJP3_A5: JP3.A5 R1.2 | length 3.3
  Top Layer w0.25: R1.2 JP3.A5
NetJP3_B5: JP3.B5 R3.2 | length 3.5
  Top Layer w0.25: R3.2 JP3.B5
NetQ2_1: Q2.1 R13.1 R17.2 | length 6.2
  Top Layer w0.25: R17.2 67.275,39.775 67.275,41.275 Q2.1 67.3,41.5 67.475,41.675 67.675,41.675 69.75,43.75 R13.1
NetQ2_3: Q2.3 R18.1 | length 3.4
  Top Layer w0.25: R18.1 67.25,42.5 68.25,43.5 Q2.3
NetR9_1: R9.1 U2.1 | length 16.6
  Top Layer w0.25: R9.1 58,54.75 60.5,52.25 60.5,41.75 61.2,41.05 U2.1
NetR10_2: R10.2 U2.5 | length 1.3
  Top Layer w0.25: R10.2 62,43.5 U2.5
NetR14_2: R14.2 U4.3 | length 4.2
  Top Layer w0.25: R14.2 26.75,20.75 27.865,19.635 U4.3
NRST: C1.2 JP2.1 R5.2 U3.7 | length 44
  Top Layer w0.25: JP2.1@16.75,45.25 R5.2 16.75,48.175 C1.2 ; JP2.1 17.73,44.27 17.73,44.145 v1(20,41.875) ; U3.7 47.035,32.99 47.915,32.99 48.155,32.75 48.5,32.75 v1(49,33.25)
  Bottom Layer w0.25: v1(20,41.875) 30.985,41.875 31.11,42 42.75,42 49.169,35.581 49.169,34.19 49.059,34.081 49.059,33.309 v1(49,33.25)
OLED_CS: M1.7 U3.41 | length 41.6
  Top Layer w0.25: M1.7 42.24,52.01 52,42.25 U3.41
OLED_DC: M1.6 U3.42 | length 42.4
  Top Layer w0.25: M1.6 39.7,53.55 51.5,41.75 U3.42
OLED_RST: M1.5 U3.43 | length 43.3
  Top Layer w0.25: M1.5 37.16,54.59 51,40.75 U3.43
PTT: S1.2 U3.39 | length 55.7
  Top Layer w0.25: U3.39 53,57.75 64.75,69.5 81.5,69.5 S1.2@82.971,70.971
R0: JP1.1 U3.28 | length 37.7
  Top Layer w0.25: JP1.1 55.75,5 64,13.25 64,28.023 60.023,32 U3.28
R1: JP1.2 U3.27 | length 38.6
  Top Layer w0.25: JP1.2 54.12,7 57,7 63.25,13.25 63.25,28.136 59.886,31.5 U3.27
R2: JP1.3 U3.26 | length 39.4
  Top Layer w0.25: JP1.3 52.58,8 57,8 62.5,13.5 62.5,28.25 59.75,31 U3.26
R3: JP1.4 U3.25 | length 40.2
  Top Layer w0.25: JP1.4 51.04,9 57.17,9 61.75,13.58 61.75,28.364 59.614,30.5 U3.25
RED: R4.2 U3.45 | length 29.3
  Top Layer w0.25: v1(49.925,40.305) 49.925,39.684 49.975,39.634 49.975,38.089 50,38.064 U3.45 ; v1(51,65) R4.2
  Bottom Layer w0.25: v1(49.925,40.305) 50.432,40.812 50.432,40.929 50.5,40.997 50.5,64.5 v1(51,65)
RF_BUSY: JP6.2 U3.12 | length 25.3
  Top Layer w0.25: U3.12 47.035,30.51 48.101,30.51 48.117,30.525 48.525,30.525 48.75,30.75 48.75,30.759 48.916,30.925 49.157,30.925 49.241,31.009 53.491,31.009 56.5,28 56.5,14.96 JP6.2
RF_CS: JP6.4 U3.13 | length 17
  Top Layer w0.25: v1(48.375,27.759) 48.375,27.854 48.49,27.969 48.49,29.015 U3.13
  Bottom Layer w0.25: v1(48.375,27.759) 48.384,27.75 48.75,27.75 49.5,27 49.5,16.88 JP6.4
RF_EN: JP6.9 U3.29 | length 28.7
  Top Layer w0.25: v1(48.748,32.003) 49.246,32.5 U3.29
  Bottom Layer w0.25: JP6.9 45.75,20.07 45.75,27 48.75,30 48.75,32.001 v1(48.748,32.003)
RF_INT: JP6.8 U3.18 | length 18.7
  Top Layer w0.25: JP6.8 42.22,14.395 42.605,14.78 42.605,14.855 51,23.25 U3.18
RF_RST: JP6.3 U3.40 | length 24.5
  Top Layer w0.25: U3.40 52.5,35.75 v1(54,34.25)
  Bottom Layer w0.25: v1(54,34.25) 54.067,34.183 54.067,33.633 54.92,32.78 JP6.3
RXD: JP2.5 U3.31 | length 42.3
  Top Layer w0.25: v1(48.544,34.608) 48.56,34.592 49.658,34.592 50.75,33.5 U3.31
  Bottom Layer w0.25: JP2.5 20.91,38.75 44.384,38.75 48.526,34.608 v1(48.544,34.608)
SCK: JP6.5 M1.3 U3.15 | length 69.6
  Top Layer w0.25: M1.3 32.08,54.67 44.75,42 45.03,42 45.155,41.875 v1(45.25,41.875) ; v1(48.567,26.183) 49.5,27.116 U3.15 49.499,29.026 v1(49.498,30.382) v1(49.498,30.382)
  Bottom Layer w0.25: v1(45.25,41.875) 45.25,40.227 49.7,35.777 49.7,31.184 49.565,31.049 49.565,30.449 v1(49.498,30.382) ; v1(48.567,26.183) 48.5,26.116 48.5,15.34 JP6.5
SWCLK: JP2.2 U3.37 | length 43.1
  Top Layer w0.25: U3.37 54.975,37.475 v1@55,37.5
  Bottom Layer w0.25: JP2.2 18.613,42.46 19.153,43 47.25,43 47.5,42.75 47.5,39.886 49.883,37.504 v1(54.954,37.504)
SWDIO: JP2.3 U3.34 | length 44.2
  Top Layer w0.25: v1(53.5,35.75) 54.25,35 U3.34
  Bottom Layer w0.25: JP2.3 19.58,42.5 46.854,42.5 47,42.354 47,39.75 51,35.75 v1(53.5,35.75)
TXD: JP2.6 U3.30 | length 43.2
  Top Layer w0.25: v1(48.434,33.816) 48.494,33.875 49.375,33.875 50.25,33 U3.30
  Bottom Layer w0.25: JP2.6 22.95,38.25 44,38.25 v1(48.434,33.816)
V_BATT: C14.2 JP5.1 Q1.3 R18.2 U2.3 | length 52
  Top Layer w0.25: C14.2@63.75,39.2 C14.2 63.95,39.4 U2.3 64,41 R18.2
  Top Layer w0.8: v1(71.75,46.75) Q1.3
  Top Layer w1: v1(63.75,37.75) C14.2@63.75,39.2
  Bottom Layer w1: JP5.1@63.75,10.5 JP5.1 v1(63.75,37.75) 69.75,37.75 71.75,39.75 v1(71.75,46.75)
V_BUS: C2.2 D3.1 D4.1 JP3.A4 JP3.A9 JP3.B4 JP3.B9 Q1.1 R11.2 U2.4 | length 52.6
  Top Layer w0.25: C2.2@63.95,44.9 C2.2 C2.2@64.05,45 ; R11.2 69.75,53.085 D4.1 ; JP3.A4 79.075,37.4 79.1,37.425 JP3.B9@79.1,37.6
  Top Layer w0.5: D3.1 61.25,57.5 65.75,53 ; U2.4 C2.2@63.95,44.9 ; C2.2@64.05,45 65.604,45 65.75,45.146 65.75,46 ; D4.1 65.75,53 ; v1(76.5,37.5) JP3.A4@77.874,37.5 ; 77.75,42.5 v1(76.5,42.5) 76.473,42.5 74.473,44.5 70.089,44.5 70.068,44.479 68.907,44.479 67.386,46 65.75,46 ; 65.75,46 65.75,53
  Top Layer w0.8: D4.1 69.835,48.915 Q1.1@70.5,48.25
  Bottom Layer w0.5: v1(76.5,37.5) v1(76.5,42.5)
V_IN: C10.1 JP6.11 S2.3 U1.1 U1.3 | length 122.2
  Top Layer w0.25: U1.3 56.675,45.075 56.675,45.675 57,46 58.15,46 58.4,45.75
  Top Layer w0.5: U1.1 58.4,45.75 58.4,46.6 58.519,46.719 58.519,48.481 v1(58.5,48.5)
  Bottom Layer w1: JP6.11 34.6,12.4 36.5,10.5 55.25,10.5 61.75,4 67,4 74.5,11.5 74.5,55 ; v1(58.5,48.5) 65,55 74.5,55 ; S2.3 74.5,55
VCC: C12.1 C13.2 C15.2 C18.2 JP2.7 JP4.1 JP6.10 JP7.4 L1.2 M1.2 R5.1 R8.1 R15.2 U1.5 U3.24 U3.48 U4.8 | length 186.5
  Top Layer w0.25: C18.2 23.525,15.325 U4.8 ; R15.2 25.25,26 ; C15.2 48.354,38.575 48.5,38.429 ; v1@48.33,40.479 v1(48.424,40.479) ; U3.48 48.5,38.429 ; v1@48.5,40.479 48.5,38.429 ; C13.2@54,27.425 U3.24 ; C13.2 55.464,27.425 55.78,27.741 v1(55.875,27.741) ; U1.5 58.412,42.488 58.412,39.491 v1(58.424,39.479) ; R8.1 v1@58.5,39.479
  Top Layer w0.5: JP2.7 20.38,26.38 ; R5.1 19.25,47 20.5,45.75 23.75,45.75 JP4.1@24.21,45.29 ; JP7.4 19.38,9.02 20.38,10.02 20.38,15.25 ; C18.2 20.38,15.25 ; JP4.1 JP4.1@24.21,45.29 ; M1.2 29.772,74.768 29.772,74.183 29.853,74.102 29.853,44.25 ; JP6.10 37.14,26 ; L1.2 43.515,27.765 41.75,26 37.14,26 ; v1@48.33,40.479 47.934,40.875 33.228,40.875 ; 20.38,15.25 20.38,26.38 ; 20.38,26.38 20.76,26 25.25,26 33.228,26 ; JP4.1@24.21,45.29 24.21,44.75 24.75,44.21 29.813,44.21 29.853,44.25 ; 29.853,44.25 33.228,40.875 ; 33.228,26 37.14,26 ; 33.228,26 33.228,40.875
  Bottom Layer w0.25: v1(48.424,40.479) v1@48.446,40.458 ; v1@58.404,39.5 v1(58.424,39.479)
  Bottom Layer w0.5: v1@48.446,40.458 48.446,39.804 48.75,39.5 56.5,39.5 ; v1(55.875,27.741) 55.875,27.768 56.5,28.393 56.5,39.5 ; v1@58.404,39.5 56.5,39.5
pads on no net: JP3.A8 JP3.B8 JP3.MH S2.1 U3.2

## Polygon pours and split planes (outlines as drawn)
GND on Bottom Layer "GND_L02_P000" (solid, remove dead copper, pour order 0): 0,0 84.75,0 84.75,85 0,85
GND on Top Layer "GND_L01_P002" (solid, remove dead copper, pour order 2): 0,0 85,0 85,85 0,85
GND on Top Layer "GND_L01_P001" (solid, remove dead copper, pour order 1): 35.5,38 35.5,26.75 42,26.75 42,38

## Keep-outs
Keep-Out Layer:
  the board outline again, w0.254

## Other copper
Top Layer:
  pour cut-out: 38,36.568 38,34.75 41.75,34.75 41.5,35 41.5,36.473

## Silkscreen, mask and mechanical layers (free items; w line width, h text height)
Top Overlay:
  text "BOOT" at 28.45,44.95 h1
  text "RST" at 18.7,44.2 h1
  text "SWCLK" at 18.7,41.95 h1
  text "SWDIO" at 18.7,39.45 h1
  text "GND" at 18.7,36.7 h1
  text "RXD" at 18.7,34.2 h1
  text "TXD" at 18.7,31.95 h1
  text "VCC" at 19.8,28.7 h1 r90
  text "M665 base board" at 38.004,22.754 h1.5
  text "v1.1" at 45.254,19.754 h1.5
  text "(c) GBL 2025" at 37.754,16.754 h1.5
  text "+" at 64.496,12.504 h1.5 r90
  text "VCC" at 19.8,10.45 h1 r90
  text "IN" at 22.55,10.45 h1 r90
  text "OUT" at 25.05,10.45 h1 r90
  text "GND" at 27.55,10.45 h1 r90
  text "C3" at 37.55,6.7 h1 r90
  text "C2" at 39.922,6.588 h1 r90
  text "C1" at 42.422,6.588 h1 r90
  text "C0" at 44.922,6.588 h1 r90
  text "R3" at 47.422,6.588 h1 r90
  text "R2" at 50.172,6.588 h1 r90
  text "R1" at 52.672,6.588 h1 r90
  text "R0" at 55.172,6.588 h1 r90
Bottom Overlay:
  text "+" at 63.004,12.504 h1.5 r270
  text "GND" at 31.45,9.7 h1 r270
  text "INT" at 41.7,9.7 h1 r270
  text "SCK" at 49.2,9.7 h1 r270
  text "NSS" at 51.95,9.7 h1 r270
  text "GND" at 59.45,9.7 h1 r270
  text "RF block" at 28.754,9.504 h1.5 r270
  text "MOSI" at 44.2,8.95 h1 r270
  text "MISO" at 46.7,8.95 h1 r270
  text "+3V3" at 36.7,8.7 h1 r270
  text "RFEN" at 38.95,8.7 h1 r270
  text "BUSY" at 56.95,8.7 h1 r270
  text "+VBAT" at 34.2,7.7 h1 r270
  text "RESET" at 54.45,7.7 h1 r270

## Text inside footprints (layer, text, board x,y; h text height)
D1: Top Overlay "+" at 54.75,74.5 h1.5
D2: Top Overlay "+" at 54.5,67.25 h1.5
D3: Top Overlay "+" at 59.5,55.25 h1.5 r180